# EAGLE board BH_Pzem_WI_FI_SHIELD (EAGLE 9.2.2)
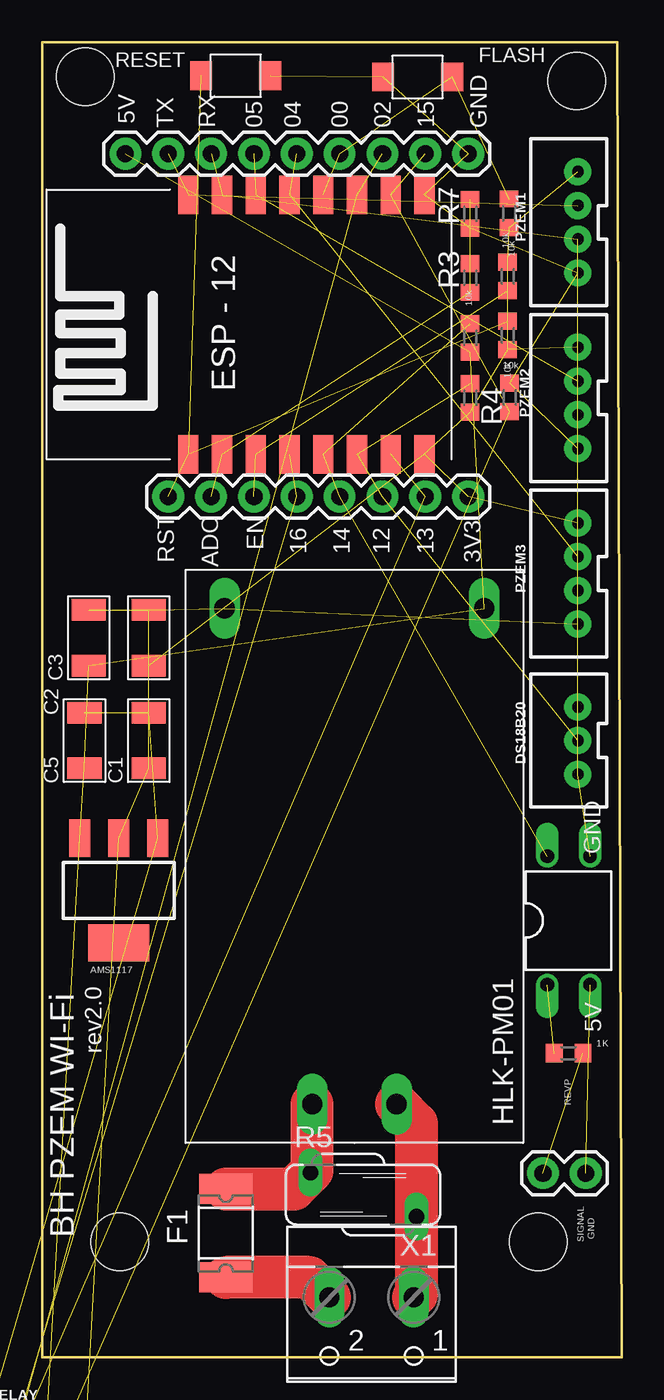
[diagram p0: board, top side]

Size 34.34 x 77.99 mm. Coordinates in mm from the lower left corner, seen from the top.
Outline: 0,0 0,77.99 34.09,77.99 34.34,0 0,0
Copper layers (1*16): Top 0.035mm / dielectric 1.5mm / Bottom 0.035mm
Design rules "default": minimum track width 6mil, minimum drill 0.35mm, track to track 6mil, track to pad 6mil, pad to pad 6mil, via to via 6mil, smd to smd 6mil, copper to edge 40mil, drill to drill 6mil, minimum pad ring 10mil, minimum via ring 8mil, stop-mask expansion 4mil, vias tented up to drill 0mil, thermal gap 10mil
Net classes: 1 220V: width 1.27 mm, clearance 2 mm
Holes 3.39 mm at 4.59,6.85 29.4,6.85 31.69,75.69 2.56,75.95

## Footprints (pad centres in the part's own frame; a part is rotated, then mirrored left to right if it is on the bottom)
SOT223 = smd 1.219 x 2.235: 1 -2.311,-3.099; 2 0,-3.099; 3 2.311,-3.099 | smd 3.6 x 2.2: 4 0,3.099
C1206 = smd 1.27 x 2.032: 1 -1.651,0; 2 1.651,0
JST-4-PTH-VERT = drill 0.7 pad 1.6: 1 -3,-0.55; 2 -1,-0.55; 3 1,-0.55; 4 3,-0.55
1X02 = drill 1.016 pad 1.88: 1 0,0; 2 2.54,0
JST-3-PTH-VERT = drill 0.7 pad 1.6: 1 -2,-0.55; 2 0,-0.55; 3 2,-0.55
1812L = smd 1.78 x 3.15: 1 -2.62,0; 2 2.62,0
B3U-1000P = smd 1.283 x 1.7: 1 -2.056,0; 2 2.056,0
1X09 = drill 1.016 pad 1.88: 1 0,0; 2 2.54,0; 3 5.08,0; 4 7.62,0; 5 10.16,0; 6 12.7,0; 7 15.24,0; 8 17.78,0; 9 20.32,0
1X08 = drill 1.016 pad 1.88: 1 0,0; 2 2.54,0; 3 5.08,0; 4 7.62,0; 5 10.16,0; 6 12.7,0; 7 15.24,0; 8 17.78,0
DIL04 = drill 0.813 offset: 1 -1.27,-3.81; 2 1.27,-3.81; 3 1.27,3.81; 4 -1.27,3.81
R0603 = smd 1 x 1.1: 1 -0.85,0; 2 0.85,0
S07K230 = drill 0.914 long: 1 -1.311,-3.121; 2 1.311,3.163
ESP12-SMD = smd 2.286 x 1.2: ADC -7.792,3.8; CH_PD -7.792,1.8; GND 7.592,-8.2; GPIO0 7.592,-2.2; GPIO2 7.592,-4.2; GPIO4 7.592,-0.2; GPIO5 7.592,1.8; GPIO12 -7.792,-4.2; GPIO13 -7.792,-6.2; GPIO14 -7.792,-2.2; GPIO15 7.592,-6.2; GPIO16 -7.792,-0.2; RESET -7.792,5.8; RXD0 7.592,3.8; TXD0 7.592,5.8; VCC -7.792,-8.2
HLK-PM01 = drill 1.2 long: 1 -14.7,2.5; 2 -14.7,-2.5; 3 14.7,7.7; 4 14.7,-7.7
W237-102 = drill 1.194 long: 1 -2.5,-1.27; 2 2.5,-1.27

## Placement (x,y rotation side)
AMS1117  LM1117  [SOT223]  4.54,27.69 180 top
C1  100uF  [C1206]  6.32,36.58 90 top
C2  22uF  [C1206]  6.32,42.67 90 top
C3  22uF  [C1206]  2.76,42.67 90 top
C5  100uF  [C1206]  2.51,36.58 90 top
DISPLAY  [JST-4-PTH-VERT]  -0.79,-10.92 0 top  (outside the outline)
DS  [1X02]  32.23,10.92 180 top
DS18B20  [JST-3-PTH-VERT]  31.21,36.58 90 top
F1  1812L010  [1812L]  10.89,7.37 90 top
FLASH  B3U-1000P-2P-SMD  [B3U-1000P]  22.25,75.93 180 top
J6  8p  [1X09]  25.25,71.38 180 top
J7  8p  [1X08]  25.25,51.04 180 top
OK1  PC817  [DIL04]  31.21,25.91 0 top
PZEM1  [JST-4-PTH-VERT]  31.21,67.31 90 top
PZEM2  [JST-4-PTH-VERT]  31.21,56.9 90 top
PZEM3  [JST-4-PTH-VERT]  31.21,46.48 90 top
R1  1K  [R0603]  31.21,18.03 0 top
R2  10k  [R0603]  25.37,60.45 90 top
R3  220k  [R0603]  25.37,64.01 90 top
R4  10k  [R0603]  25.37,56.9 270 top
R5  S07K230  [S07K230]  19.02,9.65 270 top
R7  100k  [R0603]  25.37,67.82 90 top
R8  10k  [R0603]  27.68,67.85 270 top
R9  10k  [R0603]  27.59,64.11 90 top
R10  10k  [R0603]  27.59,60.61 270 top
R11  10k  [R0603]  27.71,56.92 90 top
RELAY  [JST-3-PTH-VERT]  -1.81,-5.08 0 top  (outside the outline)
RESET  B3U-1000P-2P-SMD  [B3U-1000P]  11.47,76 0 top
RESET1  B3U-1000P-2P-SMD  [B3U-1000P]  -3.08,-17.53 0 top  (outside the outline)
U2  esp12  [ESP12-SMD]  14.46,61.35 90 top
U$1  HLK-PM01  [HLK-PM01]  18.51,29.72 90 top
X1  [W237-102]  19.53,2.29 180 top

## Library data of the parts
AMS1117 = SparkFun-IC-Power; PROD_ID: VREG-08170
C1-C3 C5 = Seeed-Capacitor; MPN: CC1206KKX7RCBB102
DISPLAY PZEM1-PZEM3 = SparkFun-Connectors; PROD_ID: CONN-13251
DS J6 = SparkFun-Connectors
DS18B20 RELAY = SparkFun-Connectors; PROD_ID: CONN-13230
F1 = polyfuse-smd_10; MF: Littelfuse; MPN: 1812L010; OC_FARNELL: 1822210; OC_NEWARK: 78R5551
FLASH = switches; DIGIKEY: SW1020CT-ND; MANUFACTURER: Omron; MPN: B3U-1000P; SPICEPREFIX: F
J7 = SparkFun-Connectors; PROD_ID: CONN-08438
OK1 = optocoupler; MPN: PC817X4J000F; OC_FARNELL: 9707727; OC_NEWARK: 97K7059
R1-R4 R7-R11 = resistor
R5 = VARISTORESBH
RESET RESET1 = switches; DIGIKEY: SW1020CT-ND; MANUFACTURER: Omron; MPN: B3U-1000P
U2 = esp8266modules
U$1 = HLK-PM01; AVAILABILITY: Unavailable; MF: Hi-link; MP: hlk-pm01; PACKAGE: Package Analog Devices; PRICE: None
X1 = con-wago-500; MPN: 237-102; OC_FARNELL: unknown; OC_NEWARK: 70K9898

## Nets
3V3: AMS1117.2 C1.1 C2.1 DISPLAY.4 DS18B20.3 J7.1 PZEM1.4 PZEM2.4 PZEM3.4 R4.2 R8.2 R9.2 R10.2 U2.VCC
A0: R3.2
ADC: J7.7 R3.1 R7.2 U2.ADC
CH_PD: J7.6 R9.1 U2.CH_PD
GND: AMS1117.1 C1.2 C2.2 C3.2 C5.2 DISPLAY.3 DS18B20.1 FLASH.2 J6.1 OK1.3 PZEM1.1 PZEM2.1 PZEM3.1 R7.1 R11.2 RELAY.1 RESET1.2 RESET.2 U2.GND U$1.3
GPIO0: FLASH.1 J6.4 R8.1 U2.GPIO0
GPIO02: J6.3 RESET1.1 U2.GPIO2
GPIO04: J6.5 PZEM3.3 U2.GPIO4
GPIO05: J6.6 PZEM2.3 U2.GPIO5
GPIO12: DS18B20.2 J7.3 R4.1 U2.GPIO12
GPIO13: J7.2 RELAY.2 U2.GPIO13
GPIO14: J7.4 OK1.4 R2.2 U2.GPIO14
GPIO15: DISPLAY.2 J6.2 R11.1 U2.GPIO15
GPIO16: DISPLAY.1 J7.5 U2.GPIO16
LINE_L [220V]: F1.2 R5.1 U$1.1
N$1: OK1.1 R1.1
N$2: F1.1 X1.2
N$3: DS.2 R1.2
NEUTRAL_IN [220V]: R5.2 U$1.2 X1.1
RESET: J7.8 R10.1 RESET.1 U2.RESET
RX: J6.7 PZEM1.2 PZEM2.2 PZEM3.2 U2.RXD0
SIGNAL_GND: DS.1 OK1.2
TX: J6.8 PZEM1.3 U2.TXD0
VCC: AMS1117.3 C3.1 C5.1 J6.9 R2.1 RELAY.3 U$1.4

## Tracks (layer width: path | path; a pad name or v marks a point on that pad's centre or on a via)
3V3  (13 unrouted)
ADC  (3 unrouted)
CH_PD  (2 unrouted)
GND  (19 unrouted)
GPIO0  (3 unrouted)
GPIO02  (2 unrouted)
GPIO04  (2 unrouted)
GPIO05  (2 unrouted)
GPIO12  (3 unrouted)
GPIO13  (2 unrouted)
GPIO14  (3 unrouted)
GPIO15  (3 unrouted)
GPIO16  (2 unrouted)
LINE_L
  Top 2.54: F1.2 14.92,9.99 R5.1 16.01,11.08 U$1.1
N$1  (1 unrouted)
N$2
  Top 2.54: X1.2 15.84,4.75 F1.1
N$3  (1 unrouted)
NEUTRAL_IN
  Top 2.54: U$1.2 22.18,13.85 R5.2 22.18,3.71 X1.1
RESET  (3 unrouted)
RX  (4 unrouted)
SIGNAL_GND  (1 unrouted)
TX  (2 unrouted)
VCC  (6 unrouted)

## Text on the board
tNames: 5V | TX | RX | 05 | 04 | 00 | 02 | 15 | GND | EN | 16 | 14 | 12 | 13 | RST | ADC | 3V3 | GND | BH PZEM WI-Fi | 5V | rev2.0 | REVP | SIGNAL / GND
bNames: HLK-PM01